# EAGLE board fio_8x8 (EAGLE 4.92)
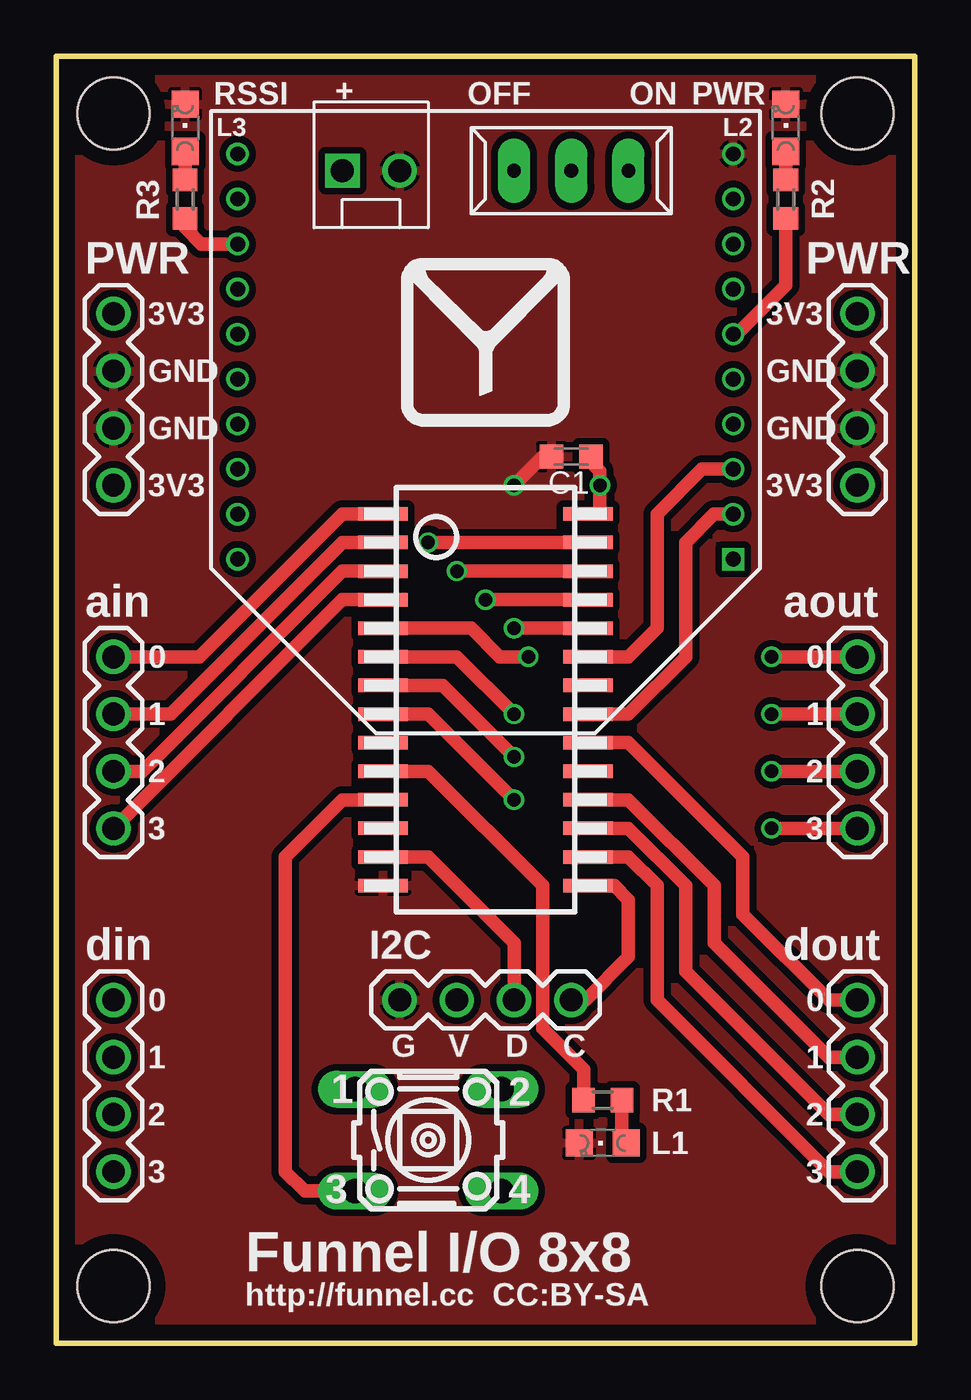
[diagram p0: board, top side]
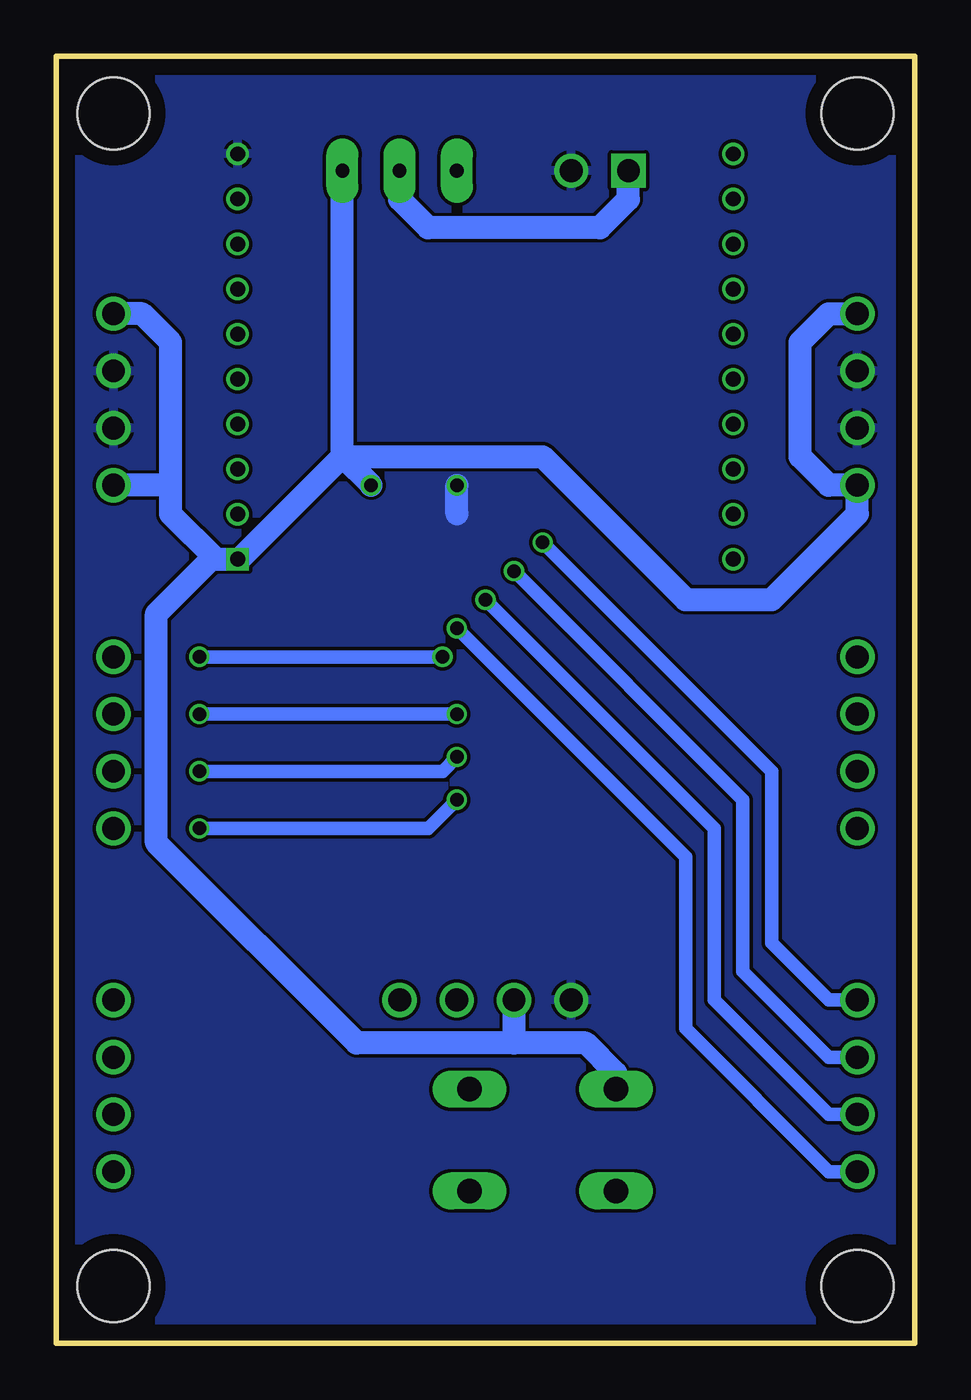
[diagram p1: board, bottom side, seen from below]

Size 38.1 x 57.15 mm. Coordinates in mm from the lower left corner, seen from the top.
Outline: 38.1,57.15 38.1,0 0,0 0,57.15 38.1,57.15
Copper layers (1*16): Top 0.035mm / dielectric 1.5mm / Bottom 0.035mm
Design rules "p-ban_min": minimum track width 0.15mm, minimum drill 0.3mm, track to track 0.15mm, track to pad 0.15mm, pad to pad 0.15mm, via to via 0.15mm, smd to smd 0.15mm, copper to edge 0.7mm, drill to drill 0.45mm, minimum pad ring 0.15mm, minimum via ring 0.15mm, stop-mask expansion 4mil, vias tented up to drill 0mil, thermal gap 0.15mm
Net classes: 1 +5v: width 0.813 mm; 2 GND: width 0.813 mm
Holes 3.2 mm at 2.54,54.61 35.56,54.61 2.54,2.54 35.56,2.54

## Footprints (pad centres in the part's own frame; a part is rotated, then mirrored left to right if it is on the bottom)
C0603K = smd 1.05 x 1.08: 1 -0.875,0; 2 0.875,0
1X04 = drill 1.016 round: 1 0,0; 2 2.54,0; 3 5.08,0; 4 7.62,0
SOIC28 = smd 0.6 x 2.2: 1 8.89,4.548; 2 7.62,4.548; 3 6.35,4.548; 4 5.08,4.548; 5 3.81,4.548; 6 2.54,4.548; 7 1.27,4.548; 8 0,4.548; 9 -1.27,4.548; 10 -2.54,4.548; 11 -3.81,4.548; 12 -5.08,4.548; 13 -6.35,4.548; 14 -7.62,4.548; 15 -7.62,-4.548; 16 -6.35,-4.548; 17 -5.08,-4.548; 18 -3.81,-4.548; 19 -2.54,-4.548; 20 -1.27,-4.548; 21 0,-4.548; 22 1.27,-4.548; 23 2.54,-4.548; 24 3.81,-4.548; 25 5.08,-4.548; 26 6.35,-4.548; 27 7.62,-4.548; 28 8.89,-4.548
CHIPLED_0805 = smd 1.2 x 1.2: A 0,-1.05; C 0,1.05
XBEE = drill 0.66 square: 1 -11,9 | drill 0.66 round: 2 -11,7; 3 -11,5; 4 -11,3; 5 -11,1; 6 -11,-1; 7 -11,-3; 8 -11,-5; 9 -11,-7; 10 -11,-9; 11 11,-9; 12 11,-7; 13 11,-5; 14 11,-3; 15 11,-1; 16 11,1; 17 11,3; 18 11,5; 19 11,7; 20 11,9
R0603 = smd 1 x 1.1: 1 -0.85,0; 2 0.85,0
B3F-10XX = drill 1.092 long: 1 -3.251,2.261; 2 3.251,2.261; 3 -3.251,-2.261; 4 3.251,-2.261
DS-3 = drill 0.61 pad 1.422 long: 1 0,-2.54; 2 0,0; 3 0,2.54
MOLEX-1X2 = drill 1.016 square: 1 0,0 | drill 1.016 round: 2 2.54,0

## Placement (x,y rotation side)
C1  [C0603K]  22.86,39.37 180 top
I2C  [1X04]  15.24,15.24 0 top
IC1  CY8C29466-24SOIC  [SOIC28]  19.05,27.94 90 top
L1  [CHIPLED_0805]  24.26,8.89 90 top
L2  [CHIPLED_0805]  32.38,53.98 0 top
L3  [CHIPLED_0805]  5.72,53.98 0 top
M1  XBEE  [XBEE]  19.05,43.81 180 top
R1  [R0603]  24.26,10.8 180 top
R2  [R0603]  32.38,50.8 270 top
R3  [R0603]  5.72,50.8 270 top
S1  [B3F-10XX]  16.51,9.02 0 top
S2  [DS-3]  22.86,52.07 270 top
SL1  ain  [1X04]  2.54,30.48 270 top
SL2  din  [1X04]  2.54,15.24 270 top
SL3  aout  [1X04]  35.56,30.48 270 top
SL4  dout  [1X04]  35.56,15.24 270 top
SL5  [1X04]  2.54,45.72 270 top
SL6  [1X04]  35.56,45.72 270 top
SL7  [MOLEX-1X2]  12.7,52.07 0 top
U$1  [FUNNEL_LOGO_SILK]  19.05,44.45 0 top

## Library data of the parts
C1 R1-R3 = rcl
I2C SL1-SL7 = SparkFun-3-2-07
IC1 = cypress-psoc
L1-L3 = led
M1 = xbee_r1
S1 = switch-omron
S2 = 1-sw
U$1 = funnel_logo

## Nets
+3V3: C1.1 I2C.2 IC1.28 M1.1 S1.1 S2.3 SL5.1 SL5.4 SL6.1 SL6.4
AIN1: IC1.1 SL1.1
AIN2: IC1.2 SL1.2
AIN3: IC1.3 SL1.3
AIN4: IC1.4 SL1.4
AOUT1: IC1.5 SL3.1
AOUT2: IC1.6 SL3.2
AOUT3: IC1.7 SL3.3
AOUT4: IC1.8 SL3.4
DIN1: IC1.27 SL2.1
DIN2: IC1.26 SL2.2
DIN3: IC1.25 SL2.3
DIN4: IC1.24 SL2.4
DOUT1: IC1.20 SL4.1
DOUT2: IC1.18 SL4.2
DOUT3: IC1.17 SL4.3
DOUT4: IC1.16 SL4.4
GND: C1.2 I2C.1 IC1.14 L1.C L2.C L3.C M1.10 SL5.2 SL5.3 SL6.2 SL6.3 SL7.2
I2CSCL: I2C.4 IC1.15
I2CSDA: I2C.3 IC1.13
N$1: S2.2 SL7.1
N$3: L2.A R2.1
N$4: M1.6 R2.2
N$5: M1.13 R3.2
N$6: L3.A R3.1
N$8: IC1.11 S1.3
N$9: IC1.10 R1.2
N$10: L1.A R1.1
RX: IC1.21 M1.2
TX: IC1.23 M1.3

## Tracks (layer width: path | path; a pad name or v marks a point on that pad's centre or on a via)
+3V3  (via drill 0.6)
  Top 0.61: IC1.28 24.13,36.83 v24.13,38.1 24.13,38.73 23.73,39.13 C1.1
  Bottom 0.61: M1.1 29.95,34.81
  Bottom 1.016: 31.01,34.81 M1.1 | 31.01,34.81 33.02,36.83 33.02,38.1 | 33.02,38.1 33.02,44.45 34.29,45.72 SL6.1 | 29.95,34.81 25.4,39.37 | 25.4,39.37 S2.3 | 33.02,38.1 SL6.4 | 25.4,39.37 16.51,39.37 10.16,33.02 6.35,33.02 2.54,36.83 SL5.4 3.81,38.1 5.08,39.37 5.08,44.45 3.81,45.72 SL5.1 | 25.4,39.37 v24.13,38.1 | 17.78,13.34 I2C.2 | 17.78,13.34 24.77,13.34 33.66,22.22 33.66,32.38 31.23,34.81 31.01,34.81 | S1.1 13.26,11.99 14.61,13.34 17.78,13.34
AIN1
  Top 0.61: IC1.1 12.7,36.83 6.35,30.48 SL1.1
AIN2
  Top 0.61: IC1.2 12.7,35.56 5.08,27.94 SL1.2
AIN3
  Top 0.61: IC1.3 12.7,34.29 3.81,25.4 SL1.3
AIN4
  Top 0.61: IC1.4 12.7,33.02 SL1.4
AOUT1  (via drill 0.6)
  Top 0.61: IC1.5 17.78,31.75 18.41,31.75 19.69,30.48 v20.96,30.48 | v31.75,30.48 SL3.1
  Bottom 0.61: v20.96,30.48 v31.75,30.48
AOUT2  (via drill 0.6)
  Top 0.61: IC1.6 17.78,30.48 v20.32,27.94 | v31.75,27.94 SL3.2
  Bottom 0.61: v20.32,27.94 v31.75,27.94
AOUT3  (via drill 0.6)
  Top 0.61: IC1.7 17.14,29.21 v20.32,26.04 | v31.75,25.4 SL3.3
  Bottom 0.61: v20.32,26.04 20.96,25.4 v31.75,25.4
AOUT4  (via drill 0.6)
  Top 0.61: IC1.8 16.51,27.94 v20.32,24.13 | v31.75,22.86 SL3.4
  Bottom 0.61: v20.32,24.13 21.59,22.86 v31.75,22.86
DIN1  (via drill 0.6)
  Top 0.61: v16.51,35.56 IC1.27
  Bottom 0.61: SL2.1 3.81,15.24 6.35,17.78 6.35,25.4 v16.51,35.56
DIN2  (via drill 0.6)
  Top 0.61: v17.78,34.29 IC1.26
  Bottom 0.61: SL2.2 3.81,12.7 7.62,16.51 7.62,24.13 v17.78,34.29
DIN3  (via drill 0.6)
  Top 0.61: v19.05,33.02 IC1.25
  Bottom 0.61: SL2.3 3.81,10.16 8.89,15.24 8.89,22.86 v19.05,33.02
DIN4  (via drill 0.6)
  Top 0.61: v20.32,31.75 IC1.24
  Bottom 0.61: SL2.4 3.81,7.62 10.16,13.97 10.16,21.59 v20.32,31.75
DOUT1
  Top 0.61: IC1.20 25.4,26.67 30.48,21.59 30.48,19.05 34.29,15.24 SL4.1
DOUT2
  Top 0.61: IC1.18 25.4,24.13 29.21,20.32 29.21,17.78 34.29,12.7 SL4.2
DOUT3
  Top 0.61: IC1.17 25.4,22.86 27.94,20.32 27.94,16.51 34.29,10.16 SL4.3
DOUT4
  Top 0.61: IC1.16 25.4,21.59 26.67,20.32 26.67,15.24 34.29,7.62 SL4.4
GND  (via drill 0.6)
  Top 0.61: C1.2 21.59,39.37 v20.32,38.1
  Bottom 1.016: 20.32,36.83 v20.32,38.1
  pour Bottom: -2.54,59.69 40.64,59.69 40.64,-2.54 -2.54,-2.54
  pour Top (isolate 0.305): -1.27,58.42 39.37,58.42 39.37,-1.27 -1.27,-1.27
I2CSCL
  Top 0.61: IC1.15 24.77,20.32 25.4,19.68 25.4,17.14 23.5,15.24 I2C.4
I2CSDA
  Top 0.61: IC1.13 16.51,21.59 20.32,17.78 I2C.3
N$1
  Bottom 1.016: S2.2 22.86,50.8 21.59,49.53 13.97,49.53 12.7,50.8 SL7.1
N$3
  Top 0.61: R2.1 L2.A
N$4
  Top 0.61: M1.6 30.21,44.81 32.38,46.99 R2.2
N$5
  Top 0.61: R3.2 5.72,49.53 6.43,48.81 M1.13
N$6
  Top 0.61: L3.A R3.1
N$8
  Top 0.61: IC1.11 12.7,24.13 10.16,21.59 10.16,7.62 11.02,6.76 S1.3
N$9
  Top 0.61: IC1.10 16.51,25.4 21.59,20.32 21.59,13.97 23.41,12.15 R1.2
N$10
  Top 0.61: L1.A 25.4,8.89 25.11,9.18 R1.1
RX
  Top 0.61: M1.2 29.2,36.81 27.94,35.56 27.94,30.48 25.4,27.94 IC1.21
TX
  Top 0.61: IC1.23 25.4,30.48 26.67,31.75 26.67,36.83 28.66,38.81 M1.3

## Text on the board
tPlace: + | RSSI | OFF | ON | PWR | PWR | PWR | 3V3 | 3V3 | GND | GND | GND | GND | 3V3 | 3V3 | ain | aout | 0 | 0 | 1 | 1 | 2 | 2 | 3 | 3 | din | dout | 0 | 0 | 1 | G | V | D | C | 1 | 2 | 2 | 3 | 3 | http://funnel.cc CC:BY-SA
tNames: Funnel I/O 8x8
tStop: ABC
bStop: ABC